# Altium PCB MotorDriver.PcbDoc
Units mm, origin at the board's own origin, x right, y up, seen from the top; angles counter-clockwise.
Board outline 92 x 117.75 mm, 2 copper layers (Top Layer, Bottom Layer); 30 components, 17 nets, 88 pads, 3 vias.
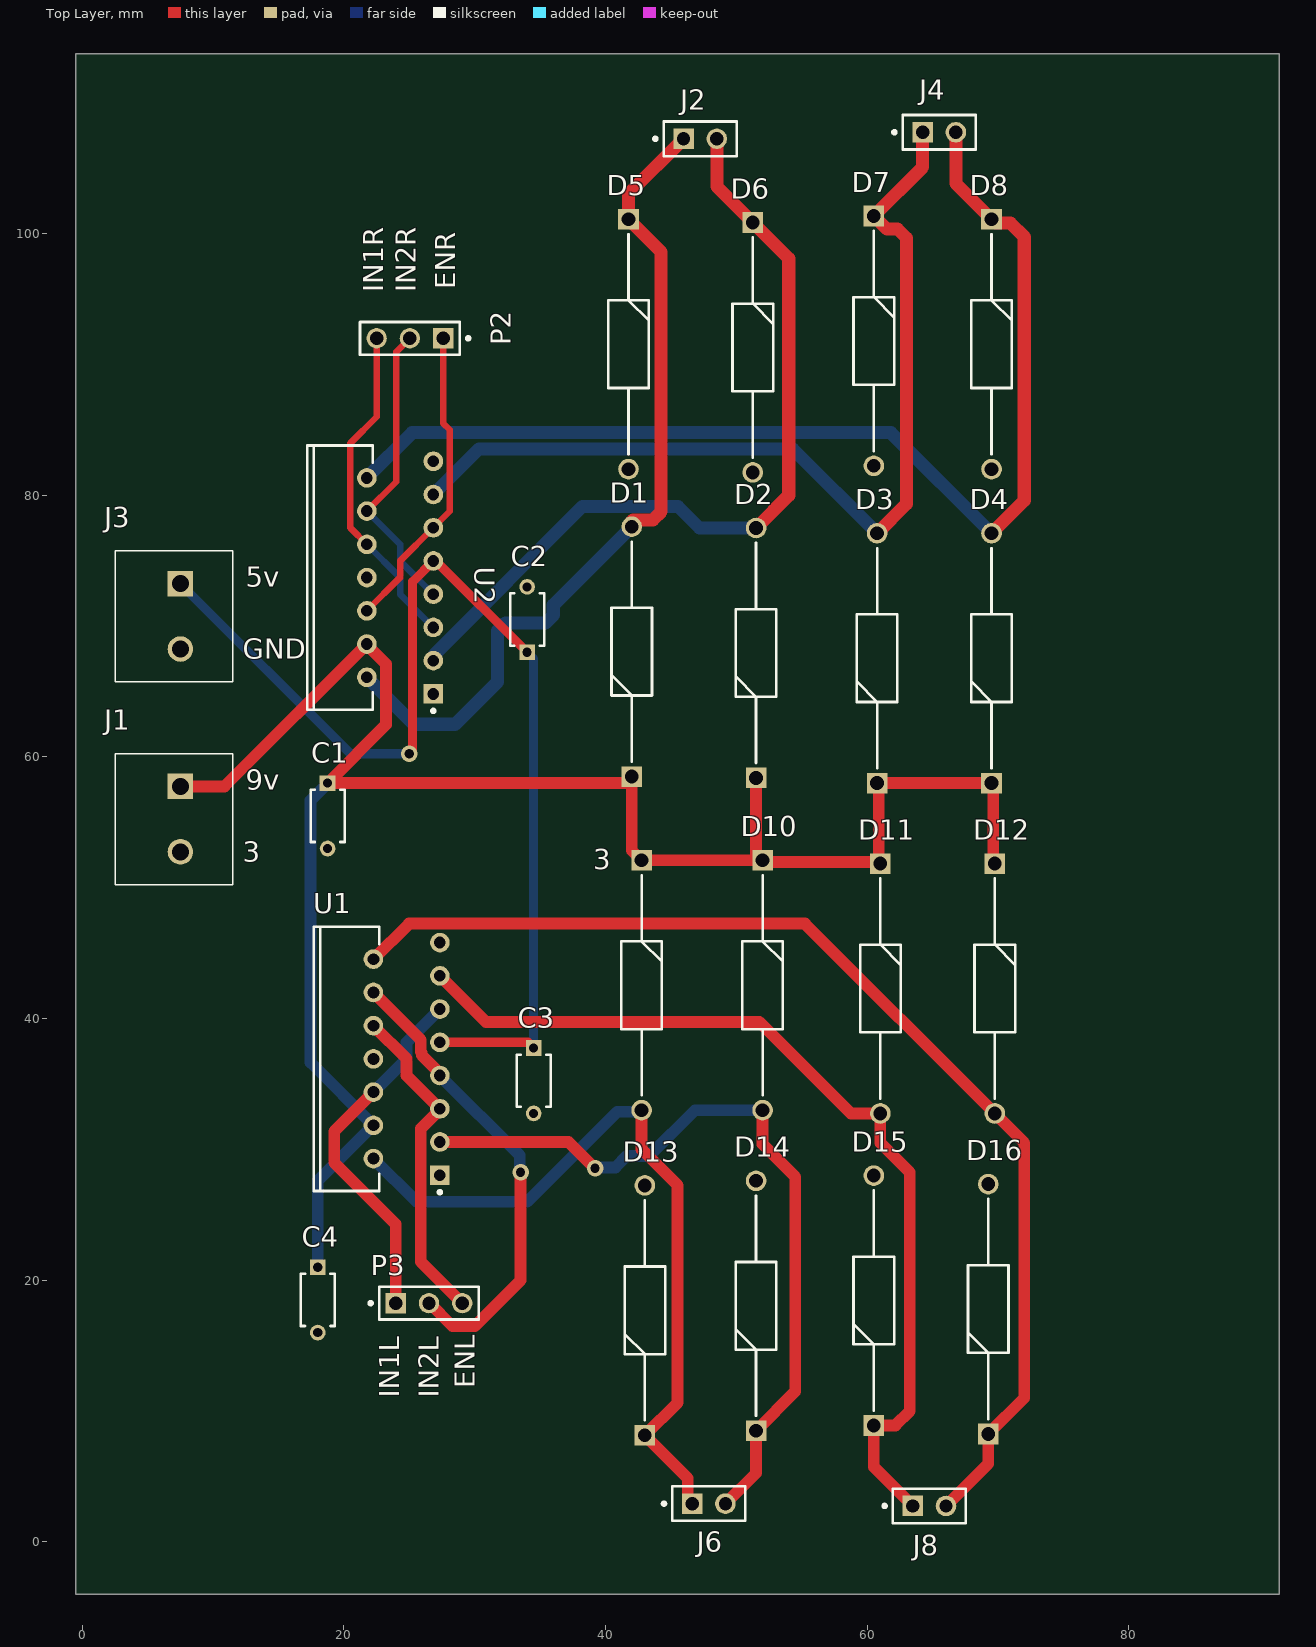
[diagram p0: Top Layer view]
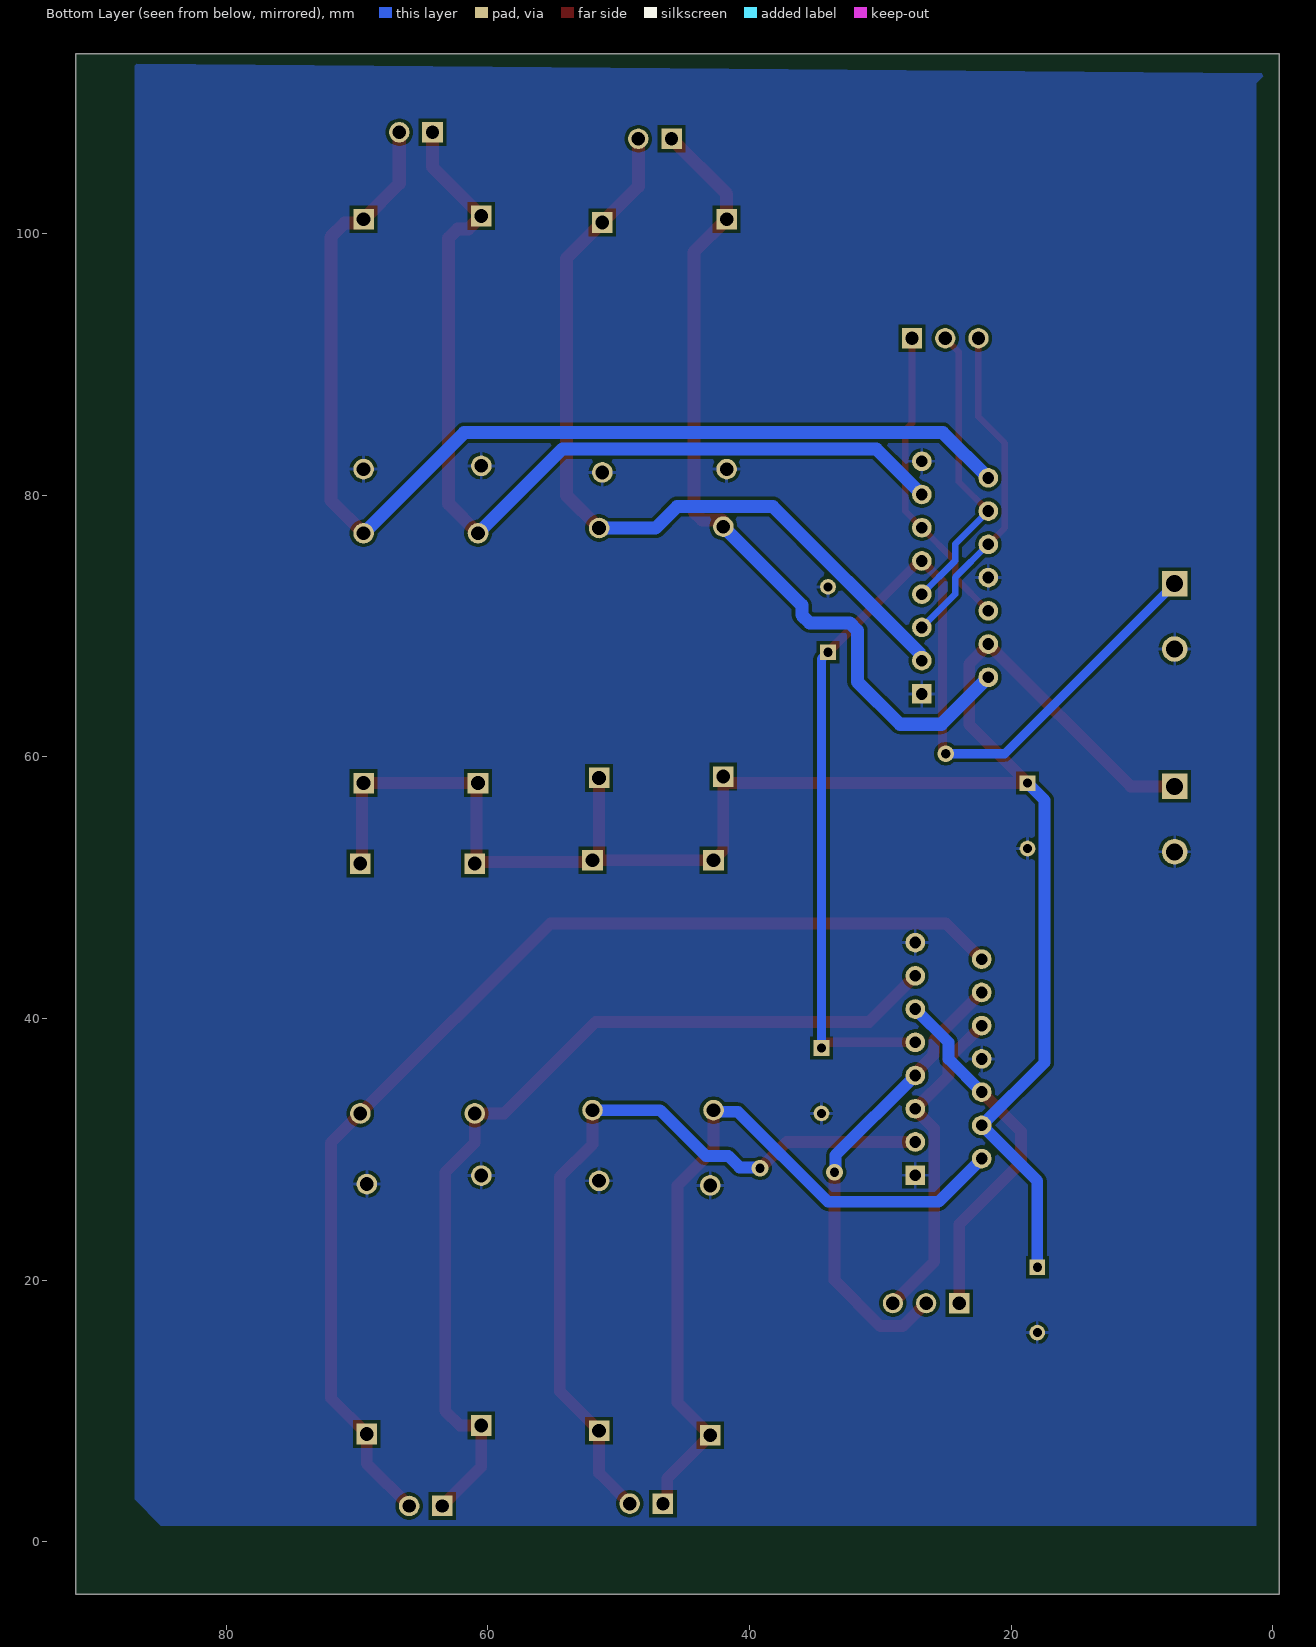
[diagram p1: Bottom Layer view, seen from below]
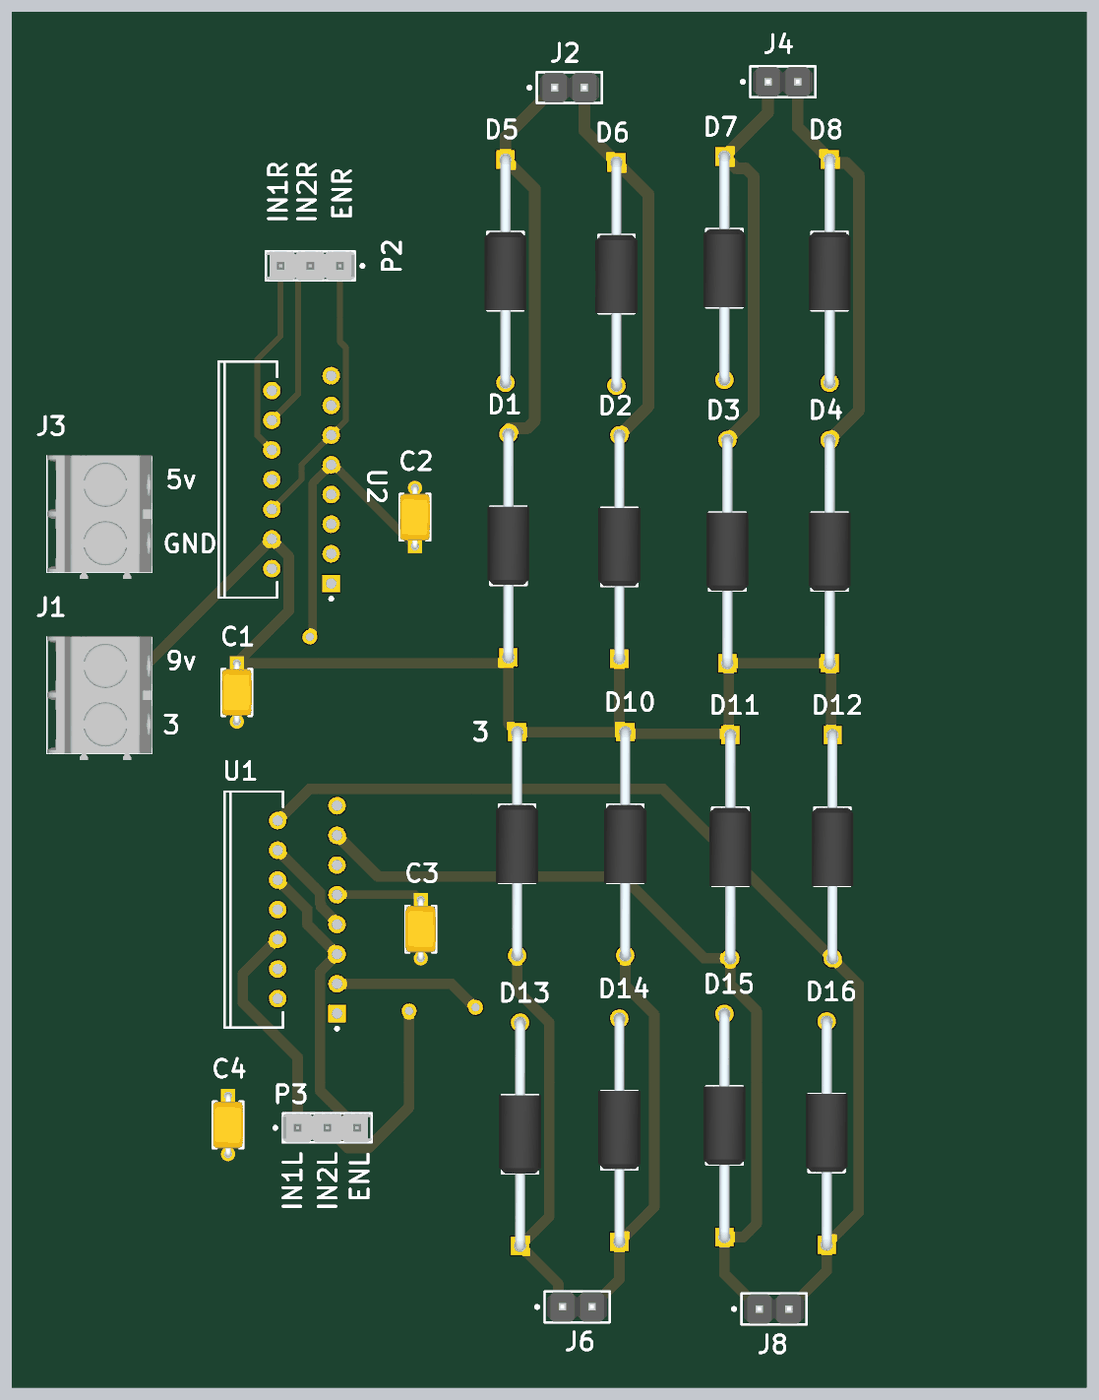
[diagram p2: 3D render of the assembled board from above, using the file's embedded part models]

## Layer stack, top to bottom
Top Solder: solder mask 0.0102, Solder Resist, Dk 3.5
Top Layer: signal copper 0.0356
Dielectric 1: dielectric 0.32, FR-4, Dk 4.8
Bottom Layer: signal copper 0.0356
Bottom Solder: solder mask 0.0102, Solder Resist, Dk 3.5

## Board outline
-0.5,-4 -0.5,113.75 91.5,113.75 91.5,-4

## Design rules (kind name [scope] priority, off if disabled: settings)
Clearance [All] p1: gap=0.254 ignorepadtopadclearanceinfootprint=FALSE
PolygonConnect [All] p1: connectstyle=Relief reliefconductorwidth=0.254 reliefentries=4 polygonreliefangle="90 Angle" airgapwidth=0.254
RoutingVias [All] p1: holewidth=0.711 width=1.27 viastyle="Through Hole" minholewidth=0.711 minwidth=1.27 maxholewidth=0.711 maxwidth=1.27
SolderMaskExpansion [All] p1: expansion=0.102 istentingtop=FALSE
SupplyNets "Schematic Supply Nets_2" [InNet('GND')] p1: voltage=0.000
SupplyNets "Schematic Supply Nets_1" [InNet('+5v')] p2: voltage=0.000
SupplyNets "Schematic Supply Nets" [InNet('+9v')] p3: voltage=0.000
Width [All] p1: maxlimit=1 minlimit=0.254 preferedwidth=0.254
30 further rules are at their usual default settings.

## Classes and differential pairs
component class Main_Diagram: J1 J3
component class SecondDriver: 3 3D11 C3 C4 D10 D11 D12 D13 D14 D15 D16 J6 J8 P3 U1
component class MotorDriverSchmv1: C1 C2 D1 D2 D3 D4 D5 D6 D7 D8 D? J2 J4 P2 U2

## Components (designator, comment, footprint, x,y, rotation, side; value= is the part's Value field where it differs from the comment)
3 "SB220-E3_73" DIOAD1910W86L670D310 42.75,52.1 r270 top (schematic designator D9)
C1 "100nF" FP-K15H5-MFG 18.75,55.5 r270 top
C2 "100nF" FP-K15H5-MFG 34,70.5 r90 top
C3 "100nF" FP-K15H5-MFG 34.5,35.25 r270 top
C4 "100nF" FP-K15H5-MFG 18,18.5 r270 top
D1 "SB220-E3_73" DIOAD1910W86L670D310 42,58.5 r90 top
D2 "SB220-E3_73" DIOAD1910W86L670D310 51.5,58.4 r90 top
D3 "SB220-E3_73" DIOAD1910W86L670D310 60.75,58 r90 top
D4 "SB220-E3_73" DIOAD1910W86L670D310 69.5,58 r90 top
D5 "SB220-E3_73" DIOAD1910W86L670D310 41.75,101.1 r270 top
D6 "SB220-E3_73" DIOAD1910W86L670D310 51.25,100.85 r270 top
D7 "SB220-E3_73" DIOAD1910W86L670D310 60.5,101.35 r270 top
D8 "SB220-E3_73" DIOAD1910W86L670D310 69.5,101.1 r270 top
D10 "SB220-E3_73" DIOAD1910W86L670D310 52,52.1 r270 top
D11 "SB220-E3_73" DIOAD1910W86L670D310 61,51.85 r270 top
D12 "SB220-E3_73" DIOAD1910W86L670D310 69.75,51.85 r270 top
D13 "SB220-E3_73" DIOAD1910W86L670D310 43,8.15 r90 top
D14 "SB220-E3_73" DIOAD1910W86L670D310 51.5,8.5 r90 top
D15 "SB220-E3_73" DIOAD1910W86L670D310 60.5,8.9 r90 top
D16 "SB220-E3_73" DIOAD1910W86L670D310 69.25,8.25 r90 top
J1 "1935161" 1935161 7.5,57.75 r270 top
J2 "Motor 2" FP-M20-9990246-MFG 47.23,107.25 r0 top
J3 "1935161" 1935161 7.5,73.25 r270 top
J4 "Motor 4" FP-M20-9990246-MFG 65.5,107.75 r0 top
J6 "Motor 2" FP-M20-9990246-MFG 47.889,2.926 r0 top
J8 "Motor 4" FP-M20-9990246-MFG 64.75,2.75 r0 top
P2 "" MOLX-22-28-4033_V 25.04,92 r180 top
P3 "" MOLX-22-28-4033_V 26.5,18.25 r0 top
U1 "L298N" STM-FM-15 24.79,36.92 r180 top
U2 "L298N" STM-FM-15 24.29,73.71 r180 top

## Footprints (in the part's own frame and the unit in brackets; to place one, negate y for a bottom-side part, rotate by r counter-clockwise, add the part's x,y. Pads: shape width x height; smd on the part's side, far side on the other; paste and mask are expansions set on the pad)
1935161 [mm]
  rect 1.95x1.95 hole 1.3: 1(0,0)
  round 1.95 hole 1.3: 2(5,0)
  silkscreen extent -2.5,-5 7.5,4, body extent -2.52,-5 8.05,4, height 12.22
DIOAD1910W86L670D310 [mm]
  rect 1.575x1.575 hole 1.05: 1(0,0)
  round 1.575 hole 1.05: 2(19.1,0)
  silkscreen extent 1.14,-1.55 17.96,1.55, body extent -0.43,-1.8 19.53,1.8, height 3.59
FP-K15H5-MFG [mm]
  rect 1.2x1.2 hole 0.7 paste-2539.97 mask+0: 1(-2.5,0)
  round 1.2 hole 0.7 paste-2539.97 mask+0: 2(2.5,0)
  silkscreen extent -2,-1.3 2,1.3, body extent -3.2,-1.4 3.2,1.4, height 0.25
FP-M20-9990246-MFG [mm]
  rect 1.57x1.57 hole 1.02 paste-2539.97 mask+0: 1(-1.27,0)
  round 1.57 hole 1.02 paste-2539.97 mask+0: 2(1.27,0)
  silkscreen extent -3.55,-1.32 2.79,1.32, body extent -2.89,-1.42 2.89,1.42, height 0.25
MOLX-22-28-4033_V [mm] "THD, 3-Leads, Body 7.62x2.49mm, Pitch 2.54mm"
  rect 1.55x1.55 hole 1.02: 1(-2.54,0)
  round 1.55 hole 1.02: 2(0,0) 3(2.54,0)
  silkscreen extent -4.59,-1.24 3.81,1.24, body extent -3.81,-1.24 3.81,1.24, height 8.38
STM-FM-15 [mm] "FM, 15-Leads, Body 20.2x5mm, Pitch 1.27mm"
  rect 1.5x1.5 hole 0.9: 1(-2.54,8.89)
  round 1.5 hole 0.9: 2(2.54,7.62) 3(-2.54,6.35) 4(2.54,5.08) 5(-2.54,3.81) 6(2.54,2.54) 7(-2.54,1.27) 8(2.54,0) 9(-2.54,-1.27) 10(2.54,-2.54) 11(-2.54,-3.81) 12(2.54,-5.08) 13(-2.54,-6.35) 14(2.54,-7.62) 15(-2.54,-8.89)
  silkscreen extent -2.67,-10.1 7.09,10.31, body extent -2.8,-10.1 7.09,10.1, height 21

## Part data
3 D1 D2 D3 D4 D5 D6 D7 D8 D10 D11 D12 D13 D14 D15 D16: "Diode", Manufacturer_Name=Vishay, Manufacturer_Part_Number=SB220-E3/73, Mouser Part Number=625-SB220-E3/73, Datasheet Link=http://www.vishay.com/docs/88717/sb220.pdf, Mouser Price/Stock=https://www.mouser.co.uk/ProductDetail/Vishay-General-Semiconductor/SB220-E3-73?qs=u91jd7aysvPbXL6e9uzQKg%3D%3D
C1 C2 C3 C4: library part CMP-02417-000078-1, "CAP CER 0.1UF 50V X7R RADIAL", Case/Package=Dipped, Dielectric=X7R, Dielectric Material=Ceramic, Max Operating Temperature=125°C, Min Operating Temperature=-55°C, Package Quantity=1, Tolerance=10%, Voltage=50V, Capacitance=100nF, Construction=RADIAL, Depth=2.5mm, Diameter=500um, Height=4mm, Height - Seated (Max)=0.257inch, Lead Diameter=0.5mm, Lead Free="Lead Free", Lead Length=30mm, Lead Pitch=5mm, Lead/Base Style="Formed Leads", Length=4mm, Mount="Through Hole", Packaging="Tape and Reel", Radiation Hardening=No, RoHS Compliant=Yes, Series=K, Termination=Radial, Thickness=2.6mm, Voltage Rating=50V, Voltage Rating (DC)=50V, Weight=0.005644oz, Width=2.5mm
J1 J3: "Connector", Manufacturer_Name="Phoenix Contact", Mouser Part Number=651-1935161, Arrow Part Number=1935161, Arrow Price/Stock=https://www.arrow.com/en/products/1935161/phoenix-contact?region=nac, Datasheet Link=https://datasheet.datasheetarchive.com/originals/distributors/SFDatasheet-2/sf-00057459.pdf, Height=11.55mm, Manufacturer_Part_Number=1935161, Mouser Price/Stock=https://www.mouser.co.uk/ProductDetail/Phoenix-Contact/1935161?qs=W3wJikR1%252BS6eKzfFl8Rbew%3D%3D
J2 J4 J6 J8: library part CMP-15831-000009-1, "CONN HEADER VERT 2POS 2.54MM", Current Rating=3A, Manufacturer=Harwin, Manufacturer Part Number=M20-9990246, Temperature="-40°C to +105°C", Temperature Range High=+105°C, Temperature Range Low=-40°C, Automotive=No, Category=Conn, ComponentLink2Description=Datasheet, ComponentLink2URL=https://cdn.harwin.com/pdfs/M20-999.pdf, Conn Gender=Male, Conn Orientation=Vertical, Contact Material=Tin,Nickel, Device Class L1=Connectors, Device Class L2="Headers and Wire Housings", Device Class L3=unset, Digikey Description="CONN HEADER VERT 2POS 2.54MM", Height=8.99mm, Lead Free=Yes, Mouser Description="2.54mm (0.1\") Pitch SIL Vertical PC Tail Pin Header, 6.1mm mating pin height, tin, 2 contacts", Number of Contacts=2, Number of Rows=1, Octopart=https://octopart.com/m20-9990246-harwin-2590635, Package=M20-9990246, Pitch=2.54mm, RoHS=TRUE
P2 P3: library part CMP-1676-00001-5, "Male Header, Pitch 2.54 mm, 1 x 3 Position, Height 8.38 mm, Tail Length 3.18 mm, RoHS, Bulk", Colour=Black, Current Rating="4 A", Manufacturer=Molex, Max Operating Temperature="75 degC", Min Operating Temperature="0 degC", Package Quantity=1, Voltage Rating="250 V", ComponentLink1Description="Manufacturer URL", ComponentLink1URL=http://www.molex.com/, ComponentLink2Description=Datasheet, ComponentLink2URL=http://www.molex.com/pdm_docs/sd/022284033_sd.pdf, Contact Finish=Gold, Contact Material=Brass, Contact Plating=Gold, DatasheetVersion="Rev. G, 01/2012", Height="8.38 mm", Lead Pitch="0.1 inch", Length="7.62 mm", Mount="Through Hole", Mounting Technology="Through Hole", PackageDescription="Male Header, Pitch 2.54 mm, 1 x 3 Position, Height 8.38 mm, Tail Length 3.18 mm", PackageReference=22-28-4033, Packaging=Bulk, Pins=3, REACH SVHC=Unknown, RoHSCompliant=true, Rows=1
U1 U2: library part CMP-2000-06526-1, "Dual Full-Bridge Driver, 4.8 to 46 V, -40 to 150 degC, 15-Pin FM (MW 15L), RoHS, Tube", Driver Case Style=Multiwatt, Manufacturer=STMicroelectronics, Operating Temperature Max=130°C, Operating Temperature Min=-25°C, Output Current=2A, Output Voltage=46V, Package Description="15-Pin Flange Mount, Body 5 x 19.6 mm, Pitch 1.27 mm", Package Reference=FM-15, PartNumber=L298, Supply Voltage Max=7V, Supply Voltage Min=4.5V, Automotive Qualification Standard=-, Datasheet URL=https://datasheet.ciiva.com/15109/getdatasheetpartid-50682-15109332.pdf, Datasheet Version=01/2000, Manufacturer URL=http://www.st.com/, Motor Type=FullBridge, Mounting Technology=ThroughHole, MSL=-, No. of Outputs=4Outputs, No. of Pins=15Pins, Packaging=Each, Product Range=-, SVHC=NoSVHC(17-Dec-2015)

## Via types
v1: diameter 1.27, hole 0.711, Top Layer to Bottom Layer, 3 vias

## Nets (pads, with @x,y where several pads share a name; then routed paths per layer and width w, separated by ;. In a path a pad name is that pad's centre, name@x,y a point inside that pad or via, vN(x,y) a via of type N, cw(c..) or ccw(c..) an arc to the next point about the centre after c; other vN are vias at no path point)
+5v: C2.1 C3.1 J3.1 U1.9 U2.9 | length 86.2
  Top Layer w0.7: v1(25,60.25) 25.25,60.5 25.25,73.4 U2.9 27.02,74.98 C2.1 ; U1.9 34.06,38.19 C3.1
  Bottom Layer w0.7: J3.1 20.5,60.25 v1(25,60.25) ; C2.1 34.5,67.5 C3.1
+9v: 3.1 C1.1 C4.1 D1.1 D2.1 D3.1 D4.1 D10.1 D11.1 D12.1 J1.1 U1.4 U2.4 | length 149.2
  Top Layer w0.9: J1.1 10.87,57.75 U2.4 21.75,68.568 23.204,67.114 23.204,62.454 C1.1 41.5,58 D1.1 42,52.85 3.1 D10.1 ; D2.1 51.5,52.6 D10.1 ; D11.1 D11.1@60.875,51.975 ; D12.1 69.625,51.975 69.625,57.875 D4.1 D3.1 60.875,57.875 D11.1@60.875,51.975 ; D10.1 52.125,51.975 D11.1@60.875,51.975
  Bottom Layer w0.9: C4.1 18,27.59 U1.4 17.446,36.644 17.446,56.696 C1.1
GND: C1.2 C2.2 C3.2 C4.2 D5.2 D6.2 D7.2 D8.2 D13.2 D14.2 D15.2 D16.2 J1.2 J3.2 U1.1 U1.8 U1.15 U2.1 U2.8 U2.15
NetD1_2: D1.2 D5.1 J2.1 U2.2 | length 64.6
  Top Layer w1: D1.2@42,78 42.11,78.11 43.61,78.11 44.25,78.75 44.25,98.6 D5.1 41.75,103.04 J2.1
  Bottom Layer w1: U2.2 25.34,62.5 28.5,62.5 31.75,65.75 31.75,69.664 32.336,70.25 35.414,70.25 36,70.836 36,71.6 D1.2
NetD2_2: D2.2 D6.1 J2.2 U2.3 | length 63.5
  Top Layer w1: J2.2 48.5,103.6 D6.1 54,98.1 54,80 D2.2
  Bottom Layer w1: U2.3 26.926,67.456 26.926,67.841 38.227,79.142 45.532,79.142 47.174,77.5 D2.2
NetD3_2: D3.2 D7.1 J4.1 U2.13 | length 72.7
  Top Layer w1: D3.2 63,79.35 63,99.664 62.309,100.355 61.495,100.355 D7.1 64.23,105.08 J4.1
  Bottom Layer w1: U2.13 30.312,83.542 54.308,83.542 D3.2
NetD4_2: D4.2 D8.1 J4.2 U2.14 | length 86.9
  Top Layer w1: J4.2 66.77,103.83 D8.1 69.788,100.813 70.938,100.813 72,99.75 72,79.6 D4.2
  Bottom Layer w1: U2.14 25.216,84.796 61.804,84.796 D4.2
NetD9_2: 3.2 D13.1 J6.1 U1.2 | length 58.5
  Top Layer w0.9: 3.2 42.75,30 45.5,27.25 45.5,10.65 D13.1 46.284,4.866 46.284,3.261 J6.1
  Bottom Layer w0.9: U1.2 25.55,26 34,26 40.889,32.889 42.639,32.889 3.2
NetD10_2: D10.2 D14.1 J6.2 U1.3 | length 60.7
  Top Layer w0.9: U1.3 37.156,30.57 39.173,28.553 v1(39.197,28.553) ; J6.2 51.5,5.267 D14.1 54.5,11.5 54.5,27.896 52,30.396 D10.2
  Bottom Layer w0.9: v1(39.197,28.553) 39.268,28.624 40.756,28.624 41.632,29.5 43.334,29.5 46.834,33 D10.2
NetD11_2: D11.2 D15.1 J8.1 U1.13 | length 72.3
  Top Layer w0.9: U1.13 30.85,39.75 51.75,39.75 58.75,32.75 D11.2 61,30.5 63.25,28.25 63.25,10 62.15,8.9 D15.1 60.5,5.73 J8.1
NetD12_2: D12.2 D16.1 J8.2 U1.14 | length 88
  Top Layer w0.9: U1.14 24.974,47.264 55.236,47.264 D12.2 72,30.5 72,11 D16.1 69.25,5.98 J8.2
NetP2_1: P2.1 U2.6 U2.11 | length 23.7
  Top Layer w0.5: U2.6 24.29,73.71 24.29,74.98 U2.11 28.084,78.774 28.084,85.008 27.58,85.512 P2.1
NetP2_2: P2.2 U2.7 U2.12 | length 23
  Top Layer w0.5: U2.12 24,81.04 24,90.96 P2.2
  Bottom Layer w0.5: U2.12 24.29,76.25 24.29,74.98 U2.7
NetP2_3: P2.3 U2.5 U2.10 | length 25.6
  Top Layer w0.5: U2.10 20.496,77.504 20.496,83.991 22.5,85.995 P2.3
  Bottom Layer w0.5: U2.10 24.29,73.71 24.29,72.44 U2.5
NetP3_1: P3.1 U1.6 U1.11 | length 27.8
  Top Layer w0.9: U1.6 19.25,31.38 19.25,29 23.96,24.29 P3.1
  Bottom Layer w0.9: U1.6 24.79,36.92 24.79,38.19 U1.11
NetP3_2: P3.2 U1.7 U1.12 | length 35.8
  Top Layer w0.9: U1.12 25.876,38.374 25.876,37.466 25.944,37.398 25.944,37.198 27.33,35.812 U1.7 ; P3.2 26.547,18.25 28.297,16.5 30,16.5 33.5,20 v1(33.5,28.25)
  Bottom Layer w0.9: U1.7 33.429,29.551 33.429,28.321 v1(33.5,28.25)
NetP3_3: P3.3 U1.5 U1.10 | length 25.2
  Top Layer w0.9: U1.10 24.79,36.92 24.79,35.65 U1.5 27.33,33.048 25.876,31.594 25.876,21.414 P3.3

## Polygon pours and split planes (outlines as drawn)
GND on Bottom Layer "GND_L02_P002" (solid, pour order 2): 0.5,112.25 1.25,111.5 1.25,1.25 85,1.25 87,3.25 87,113

## Silkscreen, mask and mechanical layers (free items; w line width, h text height)
Top Overlay:
  text "ENR" at 28.496,95.754 h1.52 r90
  text "IN1R" at 22.996,95.504 h1.52 r90
  text "IN2R" at 25.496,95.504 h1.52 r90
  text "IN4" at -23.754,92.254 h1.52 r90
  text "IN3" at -26.504,92.004 h1.52 r90
  text "ENB" at -21.004,92.004 h1.52 r90
  text "5v" at 12.504,73.004 h1.52
  text "GND" at 12.254,67.504 h1.52
  text "9v" at 12.504,57.504 h1.52
  text "3" at 12.254,52.004 h1.52
  text "ENL" at 29.996,11.754 h1.52 r90
  text "IN1L" at 24.246,11.004 h1.52 r90
  text "IN2L" at 27.246,11.004 h1.52 r90